# Altium PCB PCB1.PcbDoc
Units mm, origin at the board's own origin, x right, y up, seen from the top; angles counter-clockwise.
Board outline 61.32 x 40.89 mm, 2 copper layers (Top Layer, Bottom Layer); 12 components, 12 nets, 28 pads, 4 vias.
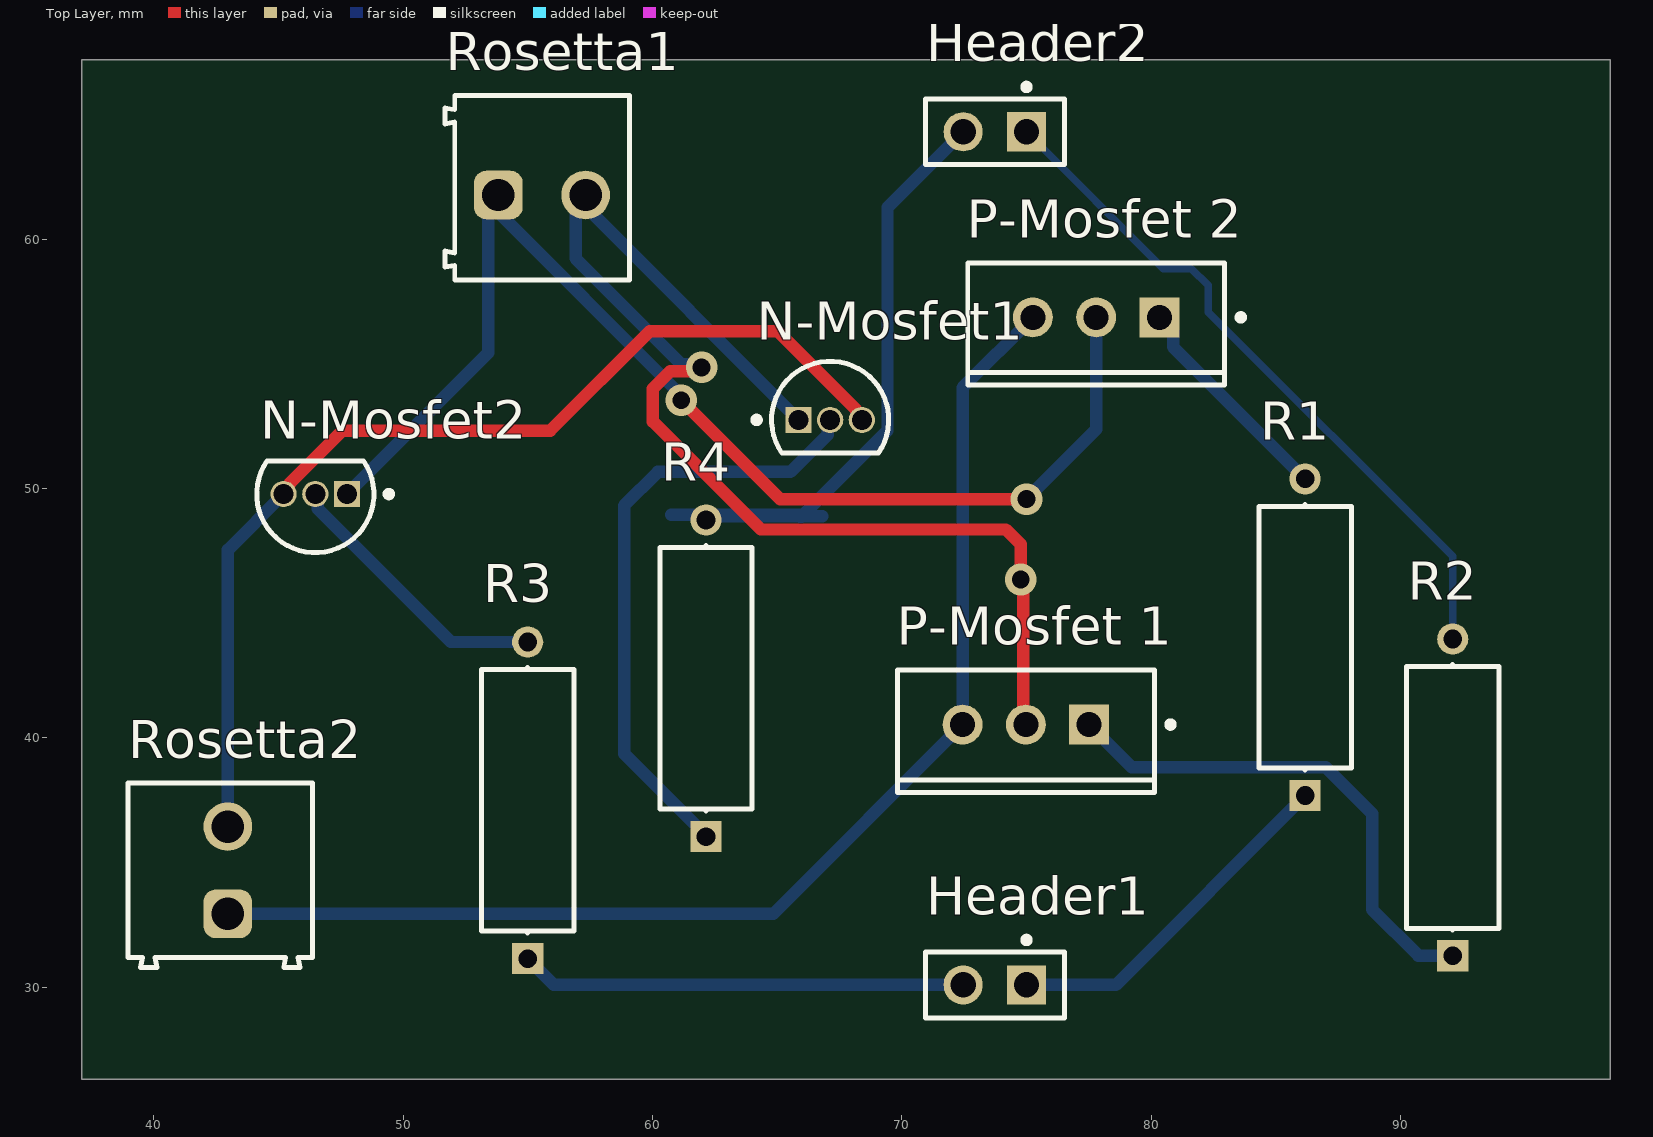
[diagram p0: Top Layer view]
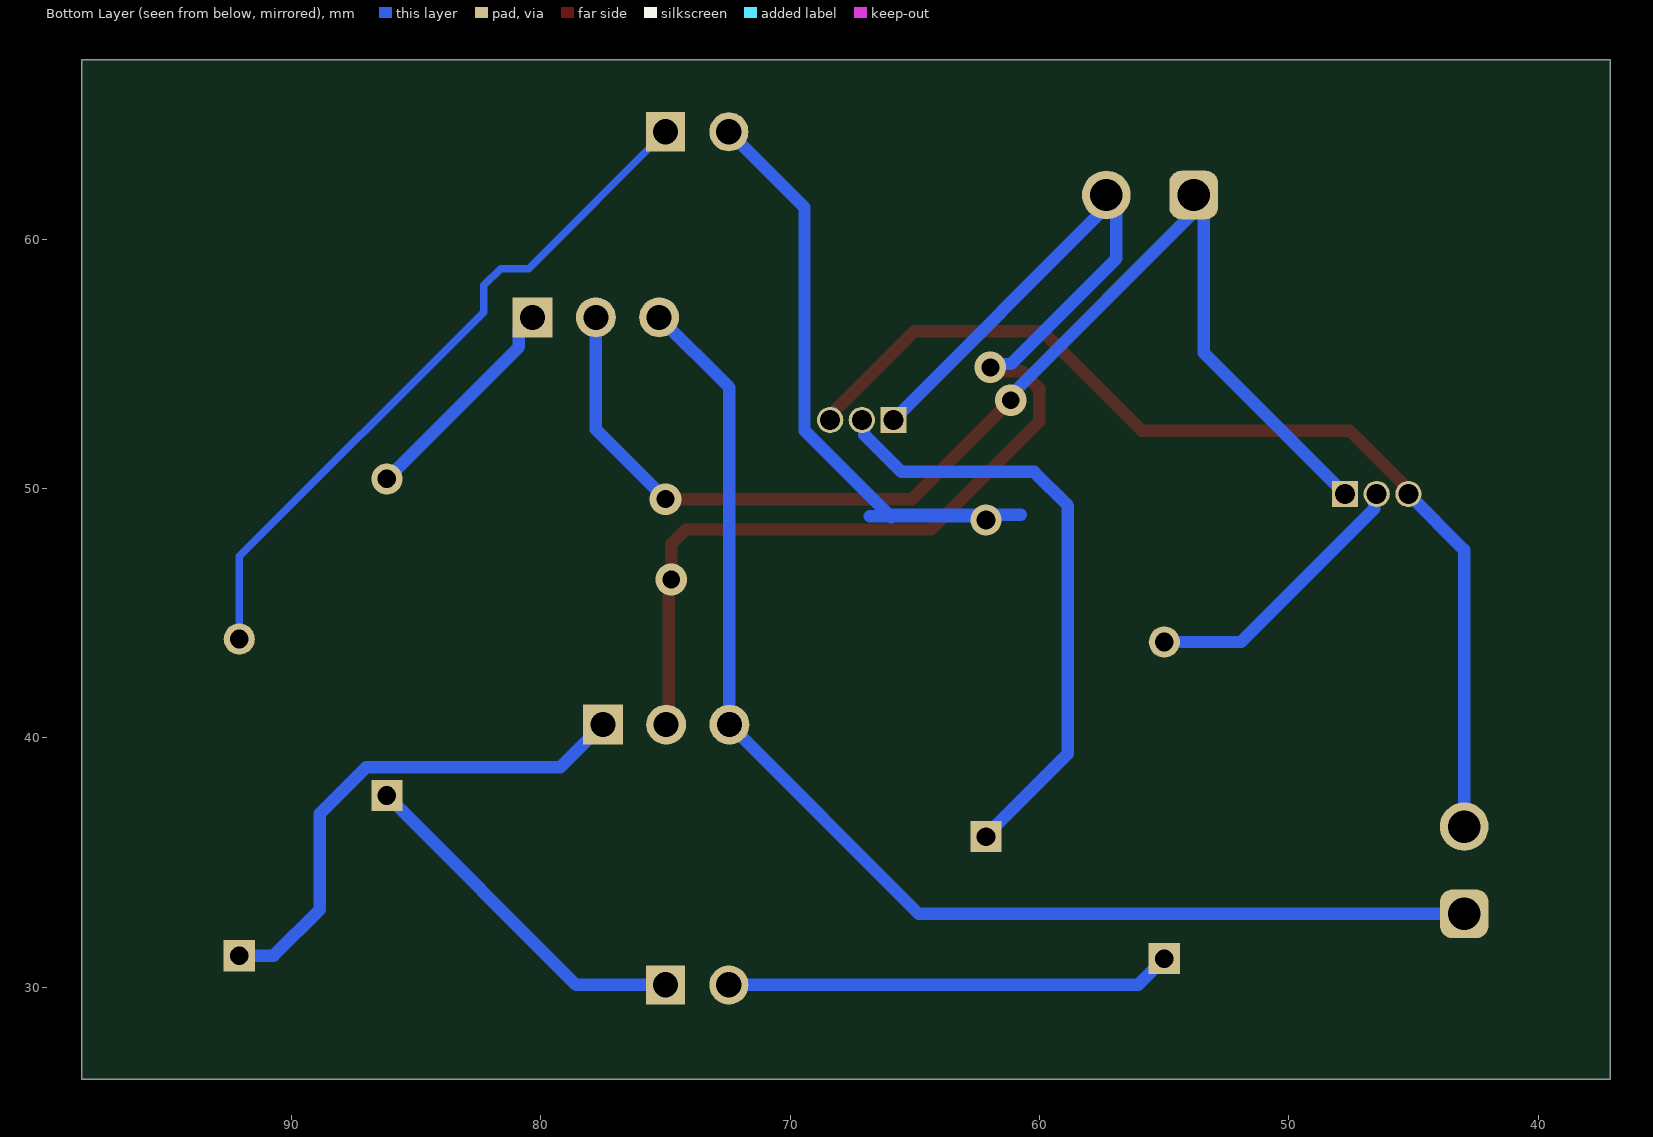
[diagram p1: Bottom Layer view, seen from below]
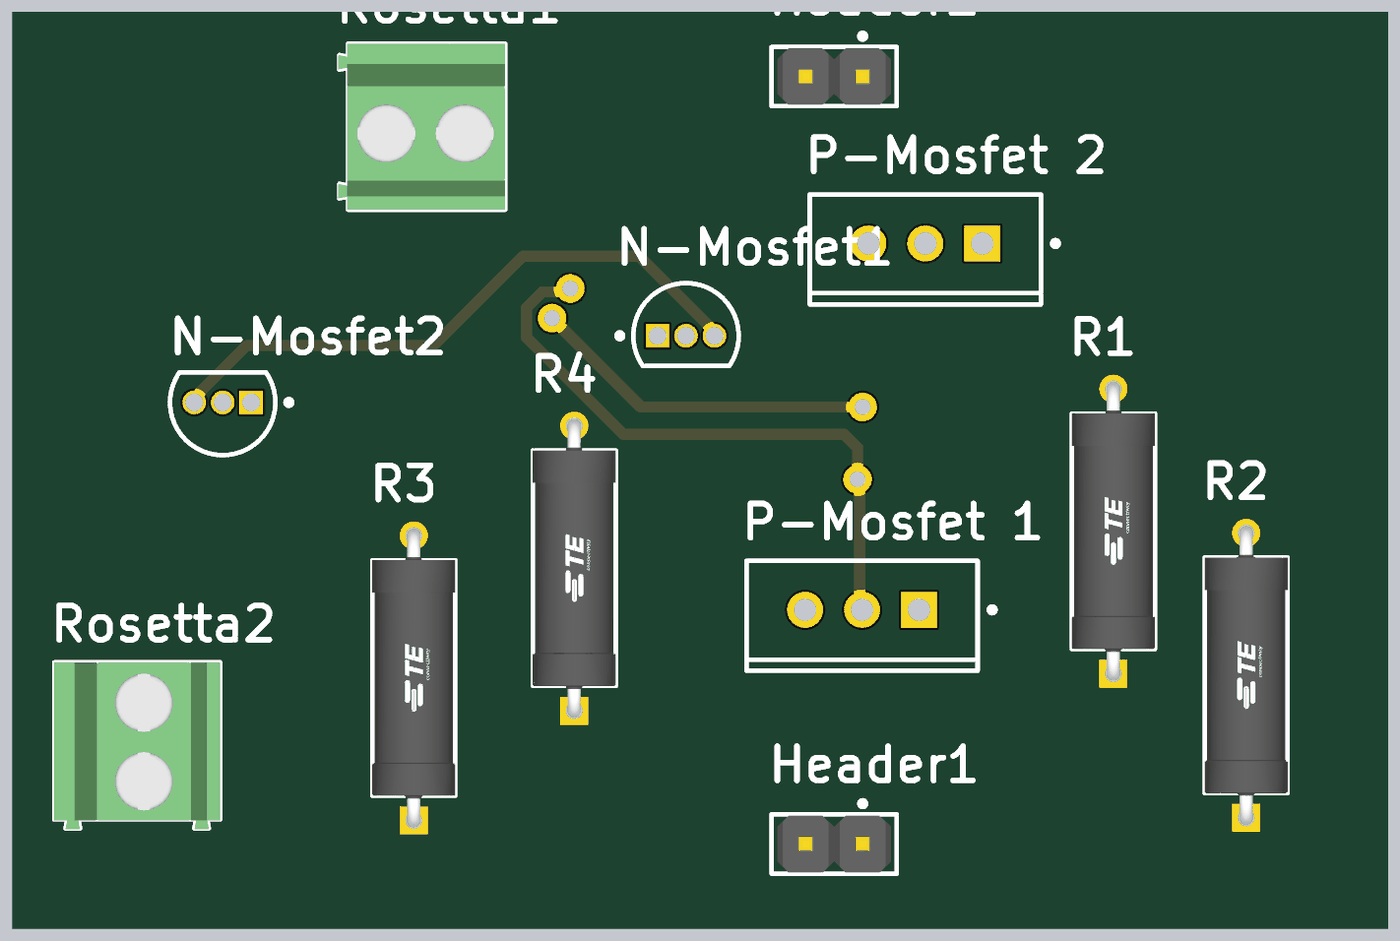
[diagram p2: 3D render of the assembled board from above, using the file's embedded part models]

## Layer stack, top to bottom
Top Solder: solder mask 0.0102, Solder Resist, Dk 3.5
Top Layer: signal copper 0.0356
Dielectric 1: dielectric 0.32, FR-4, Dk 4.8
Bottom Layer: signal copper 0.0356
Bottom Solder: solder mask 0.0102, Solder Resist, Dk 3.5

## Board outline
37.109,26.314 98.425,26.314 98.425,67.208 37.109,67.208

## Design rules (kind name [scope] priority, off if disabled: settings)
Clearance [All] p1: gap=0.254 ignorepadtopadclearanceinfootprint=FALSE
HoleSize [All] p1: absolutevalues=TRUE maxlimit=6.3 minlimit=0.3 maxpercent=80.000 minpercent=20.000
PolygonConnect [All] p1: connectstyle=Relief reliefconductorwidth=0.254 reliefentries=4 polygonreliefangle="90 Angle" airgapwidth=0.254
RoutingVias [All] p1: holewidth=0.711 width=1.27 viastyle="Through Hole" minholewidth=0.711 minwidth=1.27 maxholewidth=0.711 maxwidth=1.27
SolderMaskExpansion [All] p1: expansion=0.102 istentingtop=FALSE
SupplyNets "Schematic Supply Nets_1" [InNet('+12')] p1: voltage=0.000
SupplyNets "Schematic Supply Nets" [InNet('GND')] p2: voltage=0.000
Width [All] p1: maxlimit=1 minlimit=0.254 preferedwidth=0.254 minimp=50.000000 maximp=50.000000 favimp=50.000000
29 further rules are at their usual default settings.

## Components (designator, comment, footprint, x,y, rotation, side; value= is the part's Value field where it differs from the comment)
Header1 "M20-9990245" FP-M20-9990245-MFG 73.736,30.099 r180 top
Header2 "M20-9990245" FP-M20-9990245-MFG 73.736,64.313 r180 top
N-Mosfet1 "BS170" ONSC-TO-92-3-29-11 67.132,52.756 r0 top
N-Mosfet2 "BS170" ONSC-TO-92-3-29-11 46.482,49.784 r180 top
"P-Mosfet 1" "NTP2955" ONSC-TO-220-3-221A-09_AA 74.981,40.538 r270 top
"P-Mosfet 2" "NTP2955" ONSC-TO-220-3-221A-09_AA 77.8,56.871 r270 top
R1 "H45K0BAA" FP-H45K0BAA-MFG 86.182,44.044 r90 top
R2 "H45K0BAA" FP-H45K0BAA-MFG 92.1,37.617 r90 top
R3 "H45K0BAA" FP-H45K0BAA-MFG 55,37.5 r90 top
R4 "H45K0BAA" FP-H45K0BAA-MFG 62.154,42.393 r90 top
Rosetta1 "691214110002" 691214110002 55.575,62.078 r0 top
Rosetta2 "691214110002" 691214110002 42.672,34.696 r90 top

## Footprints (in the part's own frame and the unit in brackets; to place one, negate y for a bottom-side part, rotate by r counter-clockwise, add the part's x,y. Pads: shape width x height; smd on the part's side, far side on the other; paste and mask are expansions set on the pad)
691214110002 [mm] "3.50 mm Horizontal Entry Modular, 2p"
  rrect50% 1.95x1.95 hole 1.3: 1(-1.75,-0.3)
  round 1.95 hole 1.3: 2(1.75,-0.3)
  silkscreen extent -3.9,-3.7 3.5,3.7, body extent -3.95,-3.7 3.5,3.7, height 8.55
FP-H45K0BAA-MFG [mm]
  rect 1.25x1.25 hole 0.75 paste-2539.97 mask+0: 1(-6.35,0)
  round 1.25 hole 0.75 paste-2539.97 mask+0: 2(6.35,0)
  silkscreen extent -5.33,-1.85 5.33,1.85, body extent -7.07,-1.95 7.07,1.95, height 0.25
FP-M20-9990245-MFG [mm]
  rect 1.57x1.57 hole 1.02 paste-2539.97 mask+0: 1(-1.27,0)
  round 1.57 hole 1.02 paste-2539.97 mask+0: 2(1.27,0)
  silkscreen extent -2.79,-1.92 2.79,1.32, body extent -2.89,-1.42 2.89,1.42, height 0.25
ONSC-TO-92-3-29-11 [mm] "TO, 3-Leads, Body Dia 4.7mm, Pitch 1.27mm"
  rect 1.05x1.05 hole 0.8: 1(-1.27,0)
  round 1.05 hole 0.8: 2(0,0) 3(1.27,0)
  silkscreen extent -3.07,-1.34 2.35,2.35, body extent -2.35,-1.33 2.36,2.36, height 7.87
ONSC-TO-220-3-221A-09_AA [mm] "FM, 3-Leads, Body 10.3x4.85mm, Pitch 2.54mm"
  rect 1.6x1.6 hole 1: 1(0,2.54)
  round 1.6 hole 1: 2(0,0) 3(0,-2.54)
  silkscreen extent -2.18,-5.15 2.72,5.93, body extent -2.16,-5.15 2.69,5.15, height 19.68

## Part data
Header1 Header2: library part CMP-15831-000105-1, "CONN HEADER VERT 2POS 2.54MM", Case/Package=SIL, Color=Black, Contact Resistance=25mR, Current=3A, Flammability Rating="UL94 V-0", Insulation Resistance=10GR, Max Operating Temperature=105°C, Min Operating Temperature=-40°C, Package Quantity=1000, Voltage=50V, Voltage Rating (AC)=750V, Connector Type="Male Pin", Contact Finish - Mating=GOLD, Contact Material=Brass, Contact Mating Length=0.24inch, Contact Plating=Gold, Contact Shape=Square, Contact Type="Male Pin", Current Rating=3A, Depth=2.54mm, Fastening Type=Pull, Gender=Male, Height=0.12inch, Housing Color=Black, Housing Material=Nylon, Insulation Color=Black, Insulation Material=Nylon, Lead Pitch=2.54mm, Length=5.08mm, Mated Stacking Heights=16.54mm, Mating Cycles=300, Max Current Rating=3A, Mount="Through Hole", Number of Contacts=2, Number of Poles=2, Number of Positions=2, Number of Rows=1, Orientation=Straight, Packaging=Bulk, Pitch=2.54mm, Radiation Hardening=No, Reach SVHC Compliant=Yes, Series=M20, Termination=Solder, Weight=0.25lb, Width=0.25inch, Working Voltage=750V
N-Mosfet1 N-Mosfet2: library part CMP-1058-00929-1, "Small Signal MOSFET, 500 mA, 60 V, N-Channel, 3-Pin TO-92, Bulk Box", Manufacturer="On Semiconductor", Package Type=TO-92, Channel Polarity="N Channel", ComponentLink1Description="Manufacturer URL", ComponentLink1URL=http://www.onsemi.com/, ComponentLink2Description=Datasheet, ComponentLink2URL=http://www.onsemi.com/pub_link/Collateral/BS170-D.PDF, ComponentLink3Description="Package Specification", ComponentLink3URL=http://www.onsemi.cn/pub_link/Collateral/2N6426-D.PDF, Configuration=Single, DatasheetVersion="Rev. 6", ID Max (A)=0.5, Mounting Technology="Through Hole", PackageDescription="3-Pin Transistor Outline, Body 4.825 x 3.685 mm, Pitch 1.27 mm", PackageReference=TO-92-3-29-11_AM_SL, PackageVersion="Rev. AM", Packing="Bulk Box", PartNumber=BS170, PD Max (W)=0.35, V(BR)DSS Min (V)=60, VGS Max (V)=20, VGS(th) Max (V)=3
"P-Mosfet 1" "P-Mosfet 2": library part CMP-1058-00865-1, "Power MOSFET, -60 V, -12 A, Single P-Channel, 3-Pin TO-220, Tube", Manufacturer="On Semiconductor", Package Type=TO-220-3, Channel Polarity="P Channel", Ciss Typ (pF)=507, ComponentLink1Description="Manufacturer URL", ComponentLink1URL=http://www.onsemi.com/, ComponentLink2Description=Datasheet, ComponentLink2URL=http://www.onsemi.cn/pub_link/Collateral/NTP2955-D.PDF, ComponentLink3Description="Package Specification", ComponentLink3URL=http://www.onsemi.com/pub_link/Collateral/MAC16C-D.PDF, Configuration=Single, Coss Typ (pF)=150, Crss Typ (pF)=48, DatasheetVersion="Rev. 2", ID Max (A)=12, Mounting Technology="Through Hole", PackageDescription="3-Pin Flange Mount, Vertical Straight Lead, Body 9.97 x 4.445 mm, Pitch 2.54 mm", PackageReference=TO-220-3-221A-09_AA, PackageVersion="Rev. AA", Packing=Tube, PartNumber=NTP2955, Qrr Typ (nC)=126, V(BR)DSS Min (V)=60, VGS Max (V)=20, VGS(th) Max (V)=4
R1 R2 R3 R4: library part CMP-03212-000004-1, "RES 5.00K OHM 1/2W 0.1% AXIAL", Case/Package=Axial, Max Operating Temperature=155°C, Max Power Dissipation=500mW, Min Operating Temperature=-55°C, Number of Resistors=1, Package Quantity=250, Resistance=5kR, Resistor Type="Thin Film", Temperature Coefficient=5ppm/°C, Tolerance=0.1%, Voltage Rating=350V, Contact Plating=Tin, Diameter=3.7mm, ELV=Compliant, Lead Diameter=0.6mm, Length=10mm, Mount=Axial, Number of Terminations=2, Packaging=Bulk, Power Rating=500mW, Radiation Hardening=No, RoHS Compliant=Yes, Series="Holco, Holsworthy", Termination=Axial, Weight=0.01411oz
Rosetta1 Rosetta2: library part CMP-1502-02464-2, Color="Blue, Green", Current=10A, Max Operating Temperature=105°C, Min Operating Temperature=-40°C, Voltage=300V, Contact Material=Brass, Contact Plating="Brass, Tin", Current Rating=10A, Height=8.7mm, Housing Material=Nylon, Lead Pitch=3.5mm, Length=7.4mm, Mount="Through Hole", NexarPartId=18818288, Number of Contacts=2, Number of Levels=1, Number of Pins=2, Number of Positions Per Level=2, Number of Rows=1, Packaging=Box, Pitch=3.5052mm, Plating="Brass, Steel", REACH SVHC=Unknown, RoHS=Compliant, Stripping Length=-6mm, Termination=Screw, Voltage Rating=300V, Width=7.9mm, Wire Gauge (Max)=24AWG, Wire Gauge (Min)=16AWG, Wire/Cable Gauge=24AWG

## Via types
v1: diameter 1.27, hole 0.711, Top Layer to Bottom Layer, 4 vias

## Nets (pads, with @x,y where several pads share a name; then routed paths per layer and width w, separated by ;. In a path a pad name is that pad's centre, name@x,y a point inside that pad or via, vN(x,y) a via of type N, cw(c..) or ccw(c..) an arc to the next point about the centre after c; other vN are vias at no path point)
+12: "P-Mosfet 1.3" "P-Mosfet 2.3" Rosetta2.1 | length 50.1
  Bottom Layer w0.5: Rosetta2.1 64.849,32.946 72.441,40.538 72.441,54.051 75.26,56.871
GND: N-Mosfet1.3 N-Mosfet2.3 Rosetta2.2 | length 42.2
  Top Layer w0.5: N-Mosfet2.3 45.212,49.933 45.453,50.174 45.453,50.21 47.567,52.324 55.905,52.324 59.893,56.312 65.031,56.312 68.161,53.182 68.161,53.146 68.402,52.905 N-Mosfet1.3
  Bottom Layer w0.5: Rosetta2.2 42.972,47.544 N-Mosfet2.3 ; N-Mosfet1.3@68.297,53.046 68.297,52.861 N-Mosfet1.3
NetHeader1_1: Header1.1 R1.1 | length 14.3
  Bottom Layer w0.5: Header1.1 78.588,30.099 R1.1
NetHeader1_2: Header1.2 R3.1 | length 17.9
  Bottom Layer w0.5: R3.1 56.051,30.099 Header1.2
NetHeader2_1: Header2.1 R2.2 | length 28.1
  Bottom Layer w0.3: Header2.1 80.49,58.829 81.62,58.829 82.298,58.15 82.298,57.084 92.1,47.282 R2.2
NetHeader2_2: Header2.2 R4.2 | length 37.8
  Bottom Layer w0.5: 60.762,48.952 66.46,48.952 ; 65.952,48.85 66.079,48.977 69.431,52.33 69.431,61.278 Header2.2 ; 66.815,48.901 66.561,48.901 ; R4.2@62.001,48.901 65.952,48.901 ; R4.2@62.001,48.901 65.952,48.901 ; R4.2@62.001,48.901 65.952,48.901 ; 65.952,48.901 66.561,48.901 ; 65.952,48.901 66.561,48.901 ; 65.952,48.901 66.561,48.901
NetN-Mosfet1_1: "P-Mosfet 1.2" N-Mosfet1.1 Rosetta1.2 | length 49.4
  Top Layer w0.5: v1(61.976,54.864) 61.829,54.717 60.726,54.717 60.024,54.015 60.024,52.69 64.353,48.362 74.18,48.362 74.778,47.764 v1(74.778,46.355) 74.879,46.253 74.879,40.64 74.981,40.538
  Bottom Layer w0.5: v1(61.976,54.864) 61.84,55 61.154,55 56.921,59.233 56.921,61.468 57.15,61.468 N-Mosfet1.1
NetN-Mosfet1_2: N-Mosfet1.2 R4.1 | length 24.7
  Bottom Layer w0.5: R4.1@62.255,35.992 58.871,39.376 58.871,49.318 60.223,50.67 65.539,50.67 67.027,52.158 67.027,52.651 N-Mosfet1.2
NetN-Mosfet2_1: "P-Mosfet 2.2" N-Mosfet2.1 Rosetta1.1 | length 49.1
  Top Layer w0.5: v1(61.163,53.543) 65.126,49.581 v1(75.006,49.581)
  Bottom Layer w0.5: N-Mosfet2.1 53.421,55.453 53.421,61.468 61.163,53.726 v1(61.163,53.543) ; v1(75.006,49.581) 77.8,52.375 77.8,56.871
NetN-Mosfet2_2: N-Mosfet2.2 R3.2 | length 11.3
  Bottom Layer w0.5: N-Mosfet2.2 46.587,49.679 46.587,49.186 51.923,43.85 R3.2
"NetP-Mosfet 1_1": "P-Mosfet 1.1" R2.1 | length 20.7
  Bottom Layer w0.5: 77.521,40.538 79.237,38.823 87.016,38.823 88.871,36.968 88.871,33.122 90.725,31.267 R2.1
"NetP-Mosfet 2_1": "P-Mosfet 2.1" R1.2 | length 8.9
  Bottom Layer w0.5: 80.34,56.871 80.89,56.321 80.89,55.686 R1.2